# Altium PCB CSM32RV20_TSSOP20_V1.1.PcbDoc
Units mm, origin at the board's own origin, x right, y up, seen from the top; angles counter-clockwise.
Board outline 55.63 x 26.67 mm, 2 copper layers (Top Layer, Bottom Layer); 38 components, 38 nets, 164 pads, 187 vias.
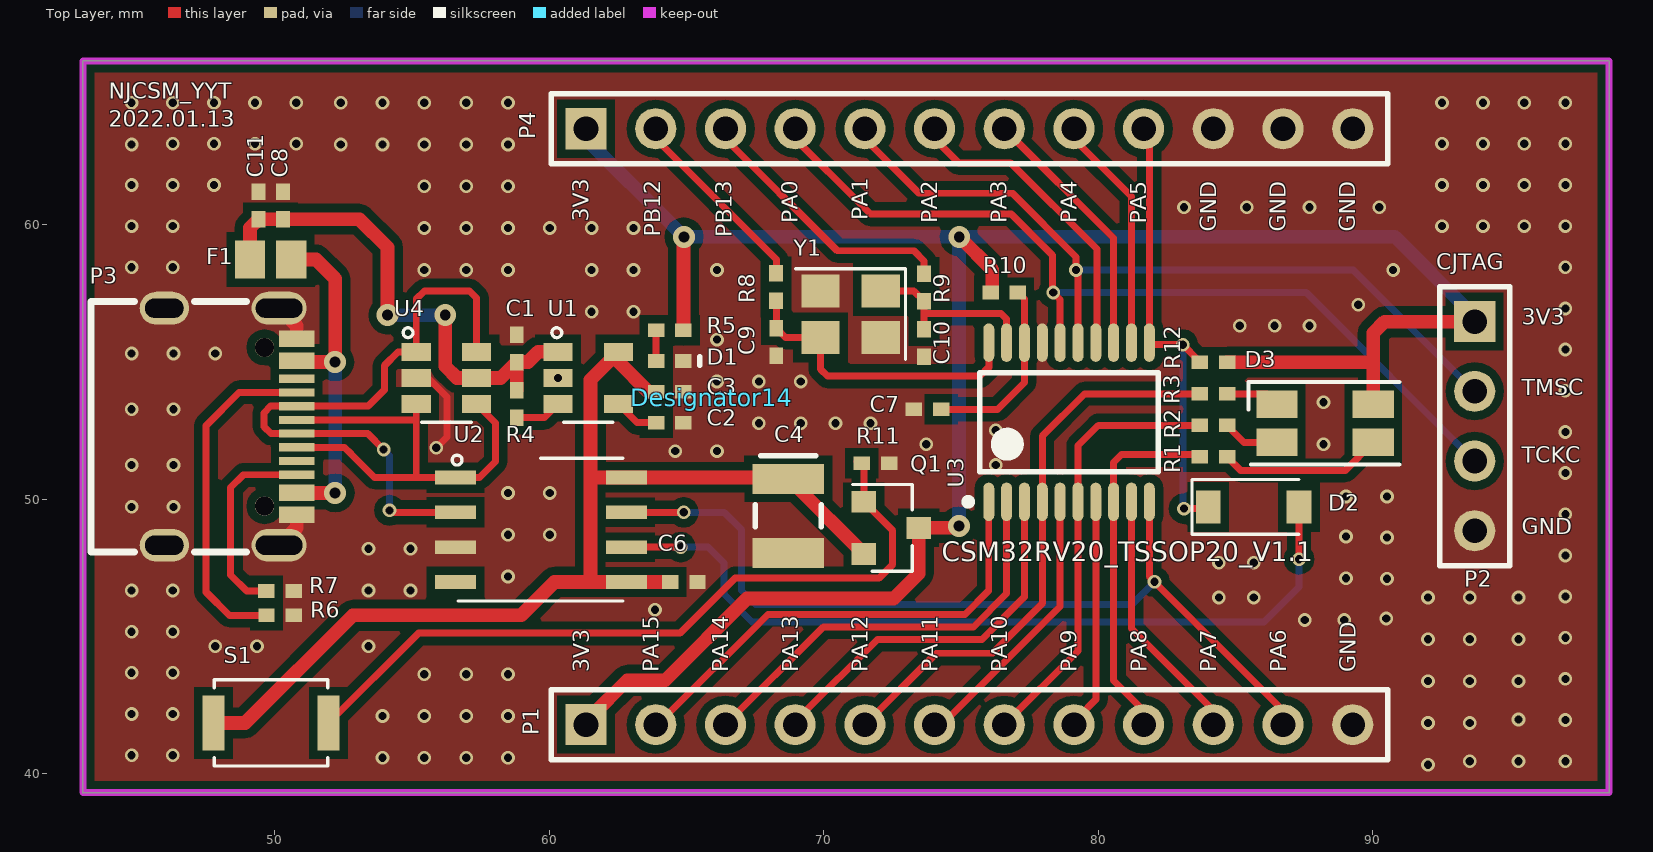
[diagram p0: Top Layer view]
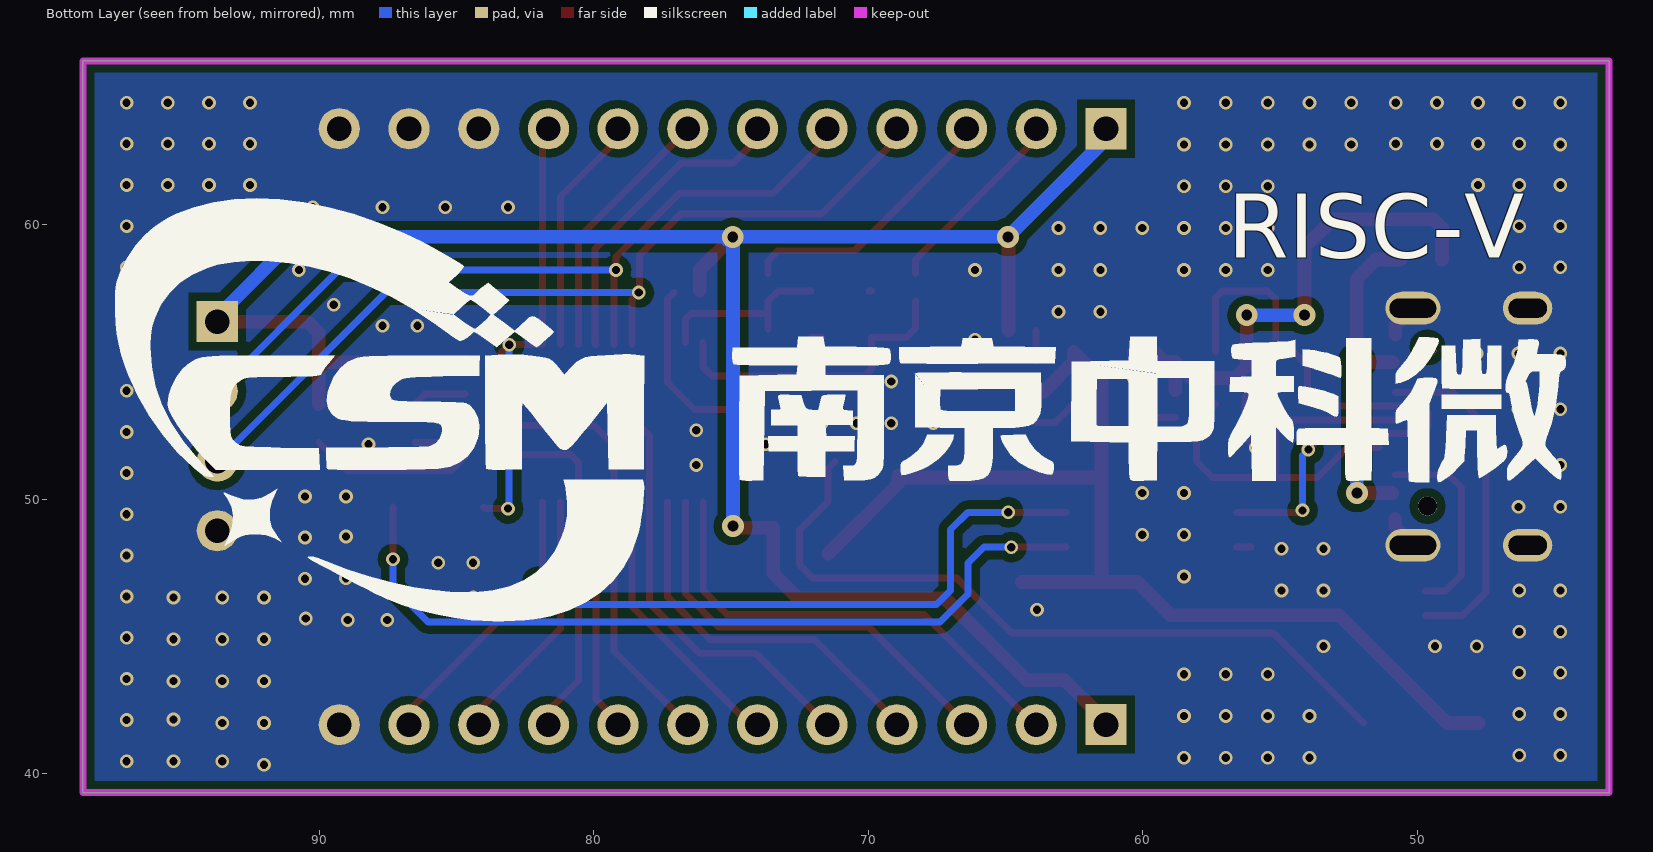
[diagram p1: Bottom Layer view, seen from below]

## Layer stack, top to bottom
Top Solder: solder mask 0.0102, Solder Resist, Dk 3.5
Top Layer: signal copper 0.0356
Dielectric1: dielectric 0.32, FR-4, Dk 4.8
Bottom Layer: signal copper 0.0356
Bottom Solder: solder mask 0.0102, Solder Resist, Dk 3.5

## Board outline
43.001,39.306 43.001,65.976 98.627,65.976 98.627,39.306

## Design rules (kind name [scope] priority, off if disabled: settings)
Clearance [All] p1: gap=0.2 ignorepadtopadclearanceinfootprint=TRUE except(0: Arc-Hole Track-Hole SMDPad-Hole THPad-Hole Via-Hole Fill-Hole Poly-Hole Region-Hole Text-Hole; 0.3: Arc-Fill Arc-Poly Arc-Region Track-Fill Track-Poly Track-Region SMDPad-Fill SMDPad-Poly SMDPad-Region THPad-Fill THPad-Poly THPad-Region Via-Fill Via-Poly Via-Region Fill-Fill Fill-Poly Fill-Region Poly-Poly Poly-Region Region-Region)
ComponentClearance [All] p1: gap=0.127 collisioncheckmode=3 verticalgap=0.254 showdistances=FALSE
MinimumSolderMaskSliver [All] p1: minsoldermaskwidth=0
PolygonConnect [All] p1: connectstyle=Direct reliefconductorwidth=0.254 reliefentries=4 polygonreliefangle="90 Angle" airgapwidth=0.254
RoutingVias [All] p1: holewidth=0.711 width=1.27 viastyle="Through Hole" minholewidth=0.29 minwidth=0.49 maxholewidth=0.711 maxwidth=1.27
SilkToSilkClearance [All] p1: silktosilkclearance=0.01
SilkToSolderMaskClearance [IsPad] p1: minsilkscreentomaskgap=0.001 clearancetoexposedcopper=TRUE
SolderMaskExpansion [All] p1: expansion=0.102
UnRoutedNet [All] p1: checkbadconnections=TRUE
Width [All] p1: maxlimit=0.5 minlimit=0.254 preferedwidth=0.254 minimp=50.000000 maximp=50.000000 favimp=50.000000
25 further rules are at their usual default settings.

## Components (designator, comment, footprint, x,y, rotation, side; value= is the part's Value field where it differs from the comment)
C1 "Cap" 0402 58.812,55.499 r270 top value=1uF
C2 "Cap" 0402 64.391,52.789 r180 top value=22nF
C3 "Cap" 0402 64.391,53.911 r180 top value=1uF
C4 "Cap Pol3" C1210 68.707,49.391 r270 top value=100uF
C6 "Cap" 0402 64.902,46.983 r180 top value=0.1uF
C7 "Cap" 0402 73.787,53.276 r0 top value=0.1uF
C8 "Cap" 0402 50.292,60.698 r270 top value=10uF
C9 "Cap" 0402 68.274,55.729 r270 top value=15pF
C10 "Cap" 0402 73.66,55.693 r270 top value=15pF
C11 "Cap" 0402 49.403,60.698 r270 top value=0.1uF
D1 "LED" "LED 0402" 64.391,55.033 r180 top
D2 "Diode" D_SOD-123 185.241,192.087 r270 top
D3 "LED_ARGB" LED_RGB_1210 -49.899,156.908 r0 top
Designator14 "Comment" LOGO-S 65.913,53.721 r180 top
F1 "0.1A" C0805 49.847,58.737 r180 top
P1 "Header 12" HDR1X12 61.341,41.783 r0 top
P2 "Header 4" HDR1X4 93.726,56.471 r270 top
P3 "USB_C_Receptacle_USB2.0" USB-C-SMD_KH-TYPE-C-16P 48.387,52.641 r270 top
P4 "Header 12" HDR1X12 61.341,63.5 r0 top
Q1 "PMOS-2" SOT-23 -49.201,152.336 r0 top
R1 "Res2" 0402 84.201,51.543 r0 top value=820R
R2 "Res2" 0402 84.201,52.691 r0 top value=820R
R3 "Res2" 0402 84.201,53.839 r0 top value=2.2K
R4 "Res2" 0402 58.812,53.475 r90 top value=2K
R5 "Res2" 0402 64.391,56.155 r0 top value=1K
R6 "Res2" 0402 50.195,45.767 r0 top value=5.1K
R7 "Res2" 0402 50.187,46.656 r0 top value=5.1K
R8 "Res2" 0402 68.266,57.729 r90 top value=0R
R9 "Res2" 0402 73.66,57.717 r90 top value=0R
R10 "Res2" 0402 76.581,57.531 r180 top value=10R
R11 "Res2" 0402 71.882,51.308 r180 top value=5K
R12 "Res2" 0402 84.201,54.988 r0 top value=10K
S1 "SW-PB" SW_PUSH_SPST_NO_ALPS_SKRK 149.554,194.373 r270 top
U1 "RT9193-33GB" SOT-23-5 -49.153,152.158 r0 top
U2 "CH340N" SOP-8-1EP_6X5MM_P1.27MM -49.201,152.336 r0 top
U3 "CSM32RV20_TSSOP20" CSM32RV20_TSSOP20 78.942,52.805 r90 top
U4 "USBLC6-2SC6" SOT-23-6 -48.777,152.145 r0 top
Y1 "32MHZ" CRYSTAL_SMD_3225-4PIN_3.2X2.5MM 231.131,-45.491 r180 top

## Footprints (in the part's own frame and the unit in brackets; to place one, negate y for a bottom-side part, rotate by r counter-clockwise, add the part's x,y. Pads: shape width x height; smd on the part's side, far side on the other; paste and mask are expansions set on the pad)
0402 [mm] "Chip Capacitor, Body 1.0x0.5mm, IPC High Density"
  rect 0.6x0.5 smd: 1(-0.5,0) 2(0.5,0)
  body extent -0.55,-0.3 0.55,0.3, height 1.3
C0805 [mm] "Chip Capacitor, Body 2.0x1.3mm, IPC High Density"
  rect 1.1x1.4 smd: 1(-0.75,0) 2(0.75,0)
  body extent -1.1,-0.72 1.1,0.72, height 1.4
C1210 [mm] "Chip Capacitor, Body 3.2x2.5mm, IPC High Density"
  rect 1.1x2.6 smd: 1(-1.35,0) 2(1.35,0)
  silkscreen extent -2.2,-1.2 0.4,1.2, body extent -1.7,-1.35 1.7,1.35, height 1.3
CRYSTAL_SMD_3225-4PIN_3.2X2.5MM [mm]
  rect 1.4x1.2 smd: 1(159.047,-103.085) 2(161.247,-103.085) 3(161.247,-101.385) 4(159.047,-101.385)
  silkscreen extent 158.15,-103.88 162.15,-100.58
CSM32RV20_TSSOP20 [mm] "TSOP, 20-Leads, Body 6.45x4.38mm, Pitch 0.65mm, IPC Medium Density"
  oval 1.4x0.4 smd: 1(-2.9,2.925) 2(-2.9,2.275) 3(-2.9,1.625) 4(-2.9,0.975) 5(-2.9,0.325) 6(-2.9,-0.325) 7(-2.9,-0.975) 8(-2.9,-1.625) 9(-2.9,-2.275) 10(-2.9,-2.925) 11(2.9,-2.925) 12(2.9,-2.275) 13(2.9,-1.625) 14(2.9,-0.975) 15(2.9,-0.325) 16(2.9,0.325) 17(2.9,0.975) 18(2.9,1.625) 19(2.9,2.275) 20(2.9,2.925)
  silkscreen extent -3.02,-3.25 1.8,3.8
D_SOD-123 [mm]
  rect 1.2x0.9 smd: 1(142.367,-101.22) 2(142.367,-97.918)
  round 0 smd: 1(142.367,-101.218) 2(142.367,-97.918)
  silkscreen extent 141.37,-101.82 143.37,-97.92
HDR1X4 [mm] "Connector; Header; 4 Position"
  rect 1.5x1.5 hole 0.9: 1(0,0)
  round 1.5 hole 0.9: 2(2.54,0) 3(5.08,0) 4(7.62,0)
  silkscreen extent -1.27,-1.27 8.89,1.27
HDR1X12 [mm] "Connector; Header; 12 Position"
  rect 1.5x1.5 hole 0.9: 1(0,0)
  round 1.5 hole 0.9: 2(2.54,0) 3(5.08,0) 4(7.62,0) 5(10.16,0) 6(12.7,0) 7(15.24,0) 8(17.78,0) 9(20.32,0) 10(22.86,0) 11(25.4,0) 12(27.94,0)
  silkscreen extent -1.27,-1.27 29.21,1.27
"LED 0402" [mm] "Chip Inductor, Body 1.0x0.5mm, IPC High Density"
  rect 0.6x0.5 smd: 1(0.5,0) 2(-0.5,0)
  silkscreen extent -1.1,-0.15 -1.1,0.15, body extent -0.55,-0.3 0.55,0.3, height 0.55
LED_RGB_1210 [mm]
  rect 1.5x1 smd: 1(139.926,-103.44) 2(139.926,-104.84) 3(136.426,-104.84) 4(136.426,-103.44)
  silkscreen extent 135.38,-105.64 140.88,-102.64
LOGO-S [mm]
SOP-8-1EP_6X5MM_P1.27MM [mm] "CH340N"
  rect 1.5x0.5 smd: 1(105.788,-101.543) 2(105.788,-102.813) 3(105.788,-104.083) 4(105.788,-105.353) 5(112.011,-105.353) 6(112.011,-104.083) 7(112.011,-102.813) 8(112.011,-101.543)
  round 0 smd: 1(105.788,-101.543) 2(105.788,-102.813) 3(105.788,-104.083) 4(105.788,-105.353) 5(111.988,-105.353) 6(111.988,-104.083) 7(111.988,-102.813) 8(111.988,-101.543)
  silkscreen extent 105.66,-106.05 111.89,-100.73
SOT-23 [mil]
  rect 35.43x31.5 smd: 1(4750.62,-4032.59) 2(4750.62,-4107.39) 3(4829.36,-4069.99)
  silkscreen extent 4735,-4132 4820,-4008
SOT-23-5 [mm]
  rect 1.06x0.65 smd: 1(109.469,-96.789) 2(109.469,-97.739) 3(109.469,-98.689) 4(111.669,-98.689) 5(111.669,-96.789)
  silkscreen extent 109.25,-99.35 111.47,-95.91
SOT-23-6 [mm]
  rect 1.06x0.65 smd: 1(103.929,-96.776) 2(103.929,-97.726) 3(103.929,-98.676) 4(106.129,-98.676) 5(106.129,-97.726) 6(106.129,-96.776)
  silkscreen extent 103.45,-99.34 105.93,-95.9
SW_PUSH_SPST_NO_ALPS_SKRK [mm]
  rect 2x0.8 smd: 1(152.527,-97.595) 2(152.527,-101.795)
  round 0 smd: roundrect(152.527,-101.795) roundrect(152.527,-97.595)
  silkscreen extent 150.96,-101.76 154.1,-97.62
USB-C-SMD_KH-TYPE-C-16P [mm]
  rect 0.3x1.3 smd: A1(-3.35,2.415) A4(-2.55,2.415) A5(-1.25,2.415) A6(-0.25,2.415) A7(0.25,2.415) A8(1.25,2.415) A9(2.55,2.415) A12(3.35,2.415) B1(3.05,2.415) B4(2.25,2.415) B5(1.75,2.415) B6(0.75,2.415) B7(-0.75,2.415) B8(-1.75,2.415) B9(-2.25,2.415) B12(-3.05,2.415)
  oval 1.2x2 hole 0.7 slot 1.7 at 90 deg: S1(-4.32,1.765) S1(4.32,1.765)
  oval 1.2x1.8 hole 0.7 slot 1.4 at 90 deg: S1(-4.32,-2.415) S1(4.32,-2.415)
  round 0.7 hole 0.7 unplated: ""(-2.89,1.235) ""(2.89,1.235)
  silkscreen extent -4.57,-5.08 4.57,0.57

## Part data
C1 C2 C3 C6 C7 C8 C9 C10 C11: "Capacitor", LatestRevisionDate=17-Jul-2002, LatestRevisionNote="Re-released for DXP Platform.", PackageDescription="Radial Cap, Thru-Hole; 2 Leads; 0.3 in Pin Spacing", PackageReference=RAD-0.3, Published=8-Jun-2000, Publisher="Altium Limited"
C4: "Polarized Capacitor (Surface Mount)", LatestRevisionDate=29-May-2009, LatestRevisionNote="IPC-7351 Footprint Added.", PackageDescription="Chip Capacitor", PackageReference=C0805, Published=8-Jun-2000, Publisher="Altium Limited"
D1: library part LED0, "Typical INFRARED GaAs LED", LatestRevisionDate=08-Jul-2005, LatestRevisionNote="Mech Layer 1 removed.", PackageDescription="LED; 2 Leads", PackageReference=LED-0, Published=8-Jun-2000, Publisher="Altium Limited"
D2: "Default Diode", Code_JEDEC=DO-214-AB, LatestRevisionDate=17-Jul-2002, LatestRevisionNote="Re-released for DXP Platform.", PackageDescription="DO-214-AB/SMC; 2 C-Bend Leads; Body 7.9 x 5.9 mm, inc. leads (LxW)", PackageReference=SMC, PackageVersion=Sep-1996, Published=8-Jun-2000, Publisher="Altium Limited"
F1: library part "Fuse 1", "Fuse", LatestRevisionDate=17-Jul-2002, LatestRevisionNote="Re-released for DXP Platform.", PackageDescription="Thru-Hole; 2 Leads", PackageReference=PIN-W2/E2.8, Published=8-Jun-2000, Publisher="Altium Limited"
P1 P4: "Header, 12-Pin", LatestRevisionDate=17-Jul-2002, LatestRevisionNote="Re-released for DXP Platform.", Publisher="Altium Limited"
P2: "Header, 4-Pin", LatestRevisionDate=17-Jul-2002, LatestRevisionNote="Re-released for DXP Platform.", Publisher="Altium Limited"
Q1: "P-Channel Power MOSFET", ComponentLink1Description="Manufacturer Link", ComponentLink1URL=http://www.irf.com/, DatasheetVersion=PD-9.390D, LatestRevisionDate=17-Jul-2002, LatestRevisionNote="Re-released for DXP Platform.", Note="Pin 4 not drawn and electrically connected to Pin 2.", PackageDescription="TO, Thru-Hole, Vertical, Heatsink Mounted; 3 In-Line Leads; Pitch 2.54 mm", PackageReference=TO-220AB, PackageVersion=Feb-1997, Published=8-Jun-2000, Publisher="Altium Limited"
R1 R2 R3 R4 R5 R6 R7 R8 R9 R10 R11 R12: "Resistor", LatestRevisionDate=17-Jul-2002, LatestRevisionNote="Re-released for DXP Platform.", PackageDescription="Axial Device, Thru-Hole; 2 Leads; 0.4 in Pin Spacing", PackageReference=AXIAL-0.4, Published=8-Jun-2000, Publisher="Altium Limited"
S1: "Switch", LatestRevisionDate=17-Jul-2002, LatestRevisionNote="Re-released for DXP Platform.", PackageDescription="Switch; 2 Leads", PackageReference=SPST-2, Published=24-Mar-1999, Publisher="Altium Limited"
U3: library part CSM32RV20_TSSOP20_1
Y1: library part Crystal
P3: Datasheet=https://www.usb.org/sites/default/files/documents/usb_type-c.zip
U4: Datasheet=https://www.st.com/resource/en/datasheet/usblc6-2.pdf

## Via types
v1: diameter 0.5, hole 0.3, Top Layer to Bottom Layer, tented both sides, 180 vias
v2: diameter 0.8, hole 0.4, Top Layer to Bottom Layer, tented both sides, 7 vias

## Nets (pads, with @x,y where several pads share a name; then routed paths per layer and width w, separated by ;. In a path a pad name is that pad's centre, name@x,y a point inside that pad or via, vN(x,y) a via of type N, cw(c..) or ccw(c..) an arc to the next point about the centre after c; other vN are vias at no path point)
3V3: D3.1 P1.1 P2.1 P4.1 Q1.3 R5.2 R10.2 R12.2 | length 80.9
  Top Layer w0.5: P1.1@61.543,42.1 62.843,43.4 64.228,43.4 67.207,46.379 72.553,46.379 73.465,47.291 Q1.3 74.866,48.958 v2(74.93,49.022) ; R5.2 64.891,59.545 v2(64.909,59.562) ; v2(74.942,59.562) 76.148,58.356 R10.2@76.148,57.594 ; R12.2 90.023,54.988 90.027,54.991 ; D3.1 90.027,54.991 ; P2.1 90.444,56.471 90.027,56.054 90.027,54.991
  Bottom Layer w0.5: P4.1@61.035,63.436 v2(64.909,59.562) v2(74.942,59.562) 90.817,59.562 P2.1@93.547,56.832 ; v2(74.93,49.022) 74.93,59.487 75.005,59.562 v2@75.129,59.439
+5: C1.2 C8.2 C11.2 F1.2 R4.2 U1.1 U4.5 | length 18.8
  Top Layer w0.5: F1.2 49.097,59.892 C11.2 C8.2 53.086,60.198 54.102,59.182 v2(54.102,56.705) ; v2(56.209,56.705) 56.209,54.847 56.637,54.419 U4.5 58.232,54.419 C1.2 ; R4.2 C1.2 ; U1.1@60.316,55.322 U1.1 59.595,55.369 59.225,54.999 C1.2
  Bottom Layer w0.5: v2@54.177,56.705 v2(56.209,56.705)
GND: C1.1 C2.1 C3.1 C4.2 C6.1 C7.1 C8.1 C9.2 C10.2 C11.1 D1.2 P1.12 P2.4 P3.A1 P3.A12 P3.B1 P3.B12 P3.S1 P4.10 P4.11 P4.12 R6.2 R7.2 R11.1 U1.2 U2.3 U3.17 U4.2 Y1.2 Y1.4 | length 7
  Top Layer w0.254: U4.2 55.579,54.419 56.277,53.721 56.277,52.271 v1(55.877,51.872) ; U2.3@56.062,48.253 U2.3@56.587,48.253 ; Y1.2 Y1.2@69.984,57.594 ; Y1.4@71.684,55.894 Y1.4
  Top Layer w0.5: P3.S1@50.152,48.321 50.802,48.971 P3.A12 ; P3.S1@50.152,56.961 50.802,56.311 P3.A1 ; P3.S1@50.449,48.321 P3.S1@50.501,48.269
  other v1: 92.023,40.322 93.547,40.449 95.325,40.449 97.031,40.452 53.923,40.576 55.447,40.576 56.971,40.576 58.495,40.576 44.779,40.672 46.279,40.672 92.023,41.846 93.547,41.846 95.325,41.973 97.031,41.952 53.923,42.1 55.447,42.1 56.971,42.1 58.495,42.1 44.779,42.172 46.279,42.172 92.023,43.37 93.547,43.37 95.325,43.37 97.031,43.452 55.447,43.624 56.971,43.624 58.495,43.624 44.779,43.672 46.279,43.672 47.827,44.64 49.351,44.64 53.415,44.64 92.023,44.894 93.547,44.894 95.325,44.894 97.031,44.952 44.779,45.172 46.279,45.172 87.53,45.601 88.975,45.601 90.499,45.656 63.854,45.97 84.403,46.418 85.673,46.418 92.023,46.418 93.547,46.418 95.325,46.418 97.031,46.452 44.779,46.672 46.279,46.672 53.415,46.672 54.939,46.672 90.53,47.101 89.039,47.116 58.495,47.18 84.403,47.688 85.673,47.688 97.031,47.952 53.415,48.196 54.939,48.196 90.53,48.601 89.039,48.64 58.495,48.704 60.019,48.704 97.031,49.452 44.779,49.72 46.303,49.72 89.039,50.101 90.53,50.101 58.495,50.228 60.019,50.228 97.031,50.952 44.779,51.244 46.303,51.244 76.275,51.244 64.591,51.752 66.115,51.752 73.735,52.006 88.213,52.006 97.031,52.452 76.275,52.514 67.639,52.768 69.163,52.768 70.433,52.768 71.703,52.768 44.779,53.276 46.303,53.276 88.213,53.53 97.031,53.952 66.115,54.292 67.639,54.292 69.163,54.292 60.316,54.419 44.779,55.308 46.303,55.308 47.827,55.308 97.031,55.452 66.115,55.816 85.165,56.324 86.435,56.324 87.705,56.324 61.543,56.832 63.067,56.832 97.031,56.952 89.483,57.086 55.447,58.356 56.971,58.356 58.495,58.356 61.543,58.356 63.067,58.356 66.115,58.356 90.753,58.356 44.779,58.452 46.279,58.452 97.031,58.452 55.447,59.88 56.971,59.88 58.495,59.88 60.019,59.88 61.543,59.88 63.067,59.88 44.779,59.952 46.279,59.952 92.531,59.952 94.031,59.952 95.531,59.952 97.031,59.952 83.133,60.642 85.419,60.642 87.705,60.642 90.245,60.642 55.447,61.404 56.971,61.404 58.495,61.404 44.779,61.452 46.279,61.452 47.779,61.452 92.531,61.452 94.031,61.452 95.531,61.452 97.031,61.452 44.779,62.928 52.399,62.928 53.923,62.928 55.447,62.928 56.971,62.928 58.495,62.928 46.279,62.952 47.779,62.952 49.279,62.952 50.779,62.952 92.531,62.952 94.031,62.952 95.531,62.952 97.031,62.952 44.779,64.452 46.279,64.452 47.779,64.452 49.279,64.452 50.779,64.452 52.399,64.452 53.923,64.452 55.447,64.452 56.971,64.452 58.495,64.452 92.531,64.452 94.031,64.452 95.531,64.452 97.031,64.452
NetC2_2: C2.2 U1.4 | length 1.7
  Top Layer w0.254: U1.4 63.196,52.789 C2.2
NetC7_2: C7.2 R10.1 U3.18 | length 6.8
  Top Layer w0.254: C7.2 76.339,53.276 77.317,54.254 U3.18 77.317,57.295 R10.1
NetC9_1: C9.1 R8.1 U3.20 Y1.3 | length 11.2
  Top Layer w0.254: R8.1 68.274,57.221 C9.1 68.609,55.894 Y1.3 69.884,54.737 70.138,54.483 75.692,54.483 76.017,54.808 U3.20
NetC10_1: C10.1 R9.1 U3.19 Y1.1 | length 6.7
  Top Layer w0.254: Y1.1 73.283,57.594 R9.1 73.66,56.769 ; C10.1 73.66,56.769 ; U3.19 76.667,56.568 76.466,56.769 73.66,56.769
NetD1_1: D1.1 R5.1 | length 1.1
  Top Layer w0.254: D1.1 R5.1
NetD2_2: D2.2 U2.6 | length 30
  Top Layer w0.254: U2.6@62.787,48.253 v1(64.788,48.253) ; v1(87.323,47.814) D2.2@87.323,49.72
  Bottom Layer w0.254: v1(64.788,48.253) 65.786,48.253 66.369,47.67 66.369,46.545 67.385,45.529 81.736,45.529 ; 81.99,45.529 81.736,45.529 ; v1(87.323,47.814) 87.323,46.798 86.054,45.529 81.736,45.529
NetD3_2: D3.2 R1.2 | length 6
  Top Layer w0.254: R1.2 85.19,51.054 89.013,51.054 D3.2 ; R1.2@84.721,51.625 R1.2@84.752,51.594
NetD3_3: D3.3 R2.2 | length 2.1
  Top Layer w0.254: R2.2 85.324,52.068 D3.3 ; R2.2@84.721,52.768 R2.2@84.749,52.739
NetD3_4: D3.4 R3.2 | length 2
  Top Layer w0.254: R3.2 86.155,53.839 D3.4
NetF1_1: F1.1 P3.A4 P3.A9 P3.B4 P3.B9 | length 12.3
  Top Layer w0.5: F1.1 51.499,58.737 52.197,58.039 v2(52.197,54.999) P3.B9@50.883,54.999 ; P3.A9@50.912,50.228 v2(52.197,50.228)
  Bottom Layer w0.5: v2(52.197,50.228) v2(52.197,54.999)
NetP3_A5: P3.A5 R6.1 | length 12.4
  Top Layer w0.254: R6.1 48.34,45.767 47.498,46.609 47.498,52.693 48.696,53.891 P3.A5
NetP3_B5: P3.B5 R7.1 | length 7.3
  Top Layer w0.254: R7.1 48.975,46.656 48.387,47.244 48.387,50.419 48.859,50.891 P3.B5
NetQ1_1: Q1.1 R11.2 S1.1 | length 27.2
  Top Layer w0.254: S1.1 55.229,45.116 64.77,45.116 66.774,47.12 72.024,47.12 72.517,47.613 72.517,48.856 Q1.1 71.465,51.124 R11.2@71.218,51.371
NetR4_1: R4.1 U1.3 | length 1.7
  Top Layer w0.254: R4.1 59.822,52.975 U1.3
PA0: P2.3 P4.4 U3.16 | length 32.8
  Top Layer w0.254: P4.4@68.655,63.436 71.703,60.388 76.836,60.388 78.334,58.891 78.334,57.567 v1(78.371,57.53) 78.617,57.284 U3.16@78.617,55.63
  Bottom Layer w0.254: v1(78.371,57.53) 87.587,57.53 P2.3
PA1: P2.2 P4.5 U3.15 | length 29.6
  Top Layer w0.254: P4.5@71.195,63.436 73.481,61.15 76.878,61.15 79.196,58.831 v1(79.196,58.356) 79.267,58.285 U3.15 U3.15@79.267,55.63
  Bottom Layer w0.254: v1(79.196,58.356) 89.301,58.356 P2.2 P2.2@93.579,53.931
PA2: P4.6 U3.14 | length 11.5
  Top Layer w0.254: P4.6@73.735,63.436 74.91,62.261 76.814,62.261 79.958,59.116 79.958,55.671 U3.14@79.917,55.63
PA3: P4.7 U3.13 | length 9.9
  Top Layer w0.254: P4.7@76.275,63.436 P4.7@76.396,63.315 ; P4.7@76.835,63.5 P4.7 80.567,59.514 U3.13 U3.13@80.567,55.63
PA4: P4.8 U3.12 | length 8.8
  Top Layer w0.254: P4.8@78.815,63.436 81.217,61.034 U3.12@81.217,55.63
PA5: D2.1 P4.9 R12.1 U3.11 | length 17
  Top Layer w0.254: P4.9@81.355,63.436 81.867,62.924 81.867,55.63 v1(83.088,55.63) R12.1@83.664,55.054 ; v1(83.133,49.657) 83.96,49.657 D2.1@84.023,49.72
  Bottom Layer w0.254: v1(83.088,55.63) 83.088,49.702 v1(83.133,49.657)
PA6: P1.11 U2.7 U3.10 | length 32.2
  Top Layer w0.254: U2.7@62.787,49.523 v1(64.902,49.523) ; U3.10 81.867,47.176 v1(82.054,46.989) P1.11@86.943,42.1
  Bottom Layer w0.254: v1(64.902,49.523) 66.376,49.523 67.004,48.895 67.004,46.672 67.512,46.164 81.228,46.164 v1(82.054,46.989)
PA7: P1.10 U3.9 | length 9.1
  Top Layer w0.254: U3.9 81.217,45.286 P1.10@84.403,42.1
PA8: P1.9 R1.1 U3.8 | length 13.1
  Top Layer w0.254: P1.9@81.863,42.1 80.567,43.396 U3.8 80.567,51.345 80.847,51.625 R1.1@83.751,51.625
PA9: P1.8 U3.7 | length 8.1
  Top Layer w0.254: P1.8@79.323,42.1 79.917,42.694 U3.7
PA10: P1.7 R2.1 U3.6 | length 16.1
  Top Layer w0.254: P1.7 79.267,44.469 79.267,51.95 79.895,52.578 80.008,52.691 R2.1 ; R2.1@83.701,52.768 R2.1@83.751,52.768
PA11: P1.6 U3.5 | length 9.8
  Top Layer w0.254: P1.6@74.243,42.1 74.624,42.1 78.617,46.093 U3.5
PA12: P1.5 R3.1 U3.4 | length 20.8
  Top Layer w0.254: P1.5 74.104,44.386 76.148,44.386 77.967,46.205 77.967,52.301 79.505,53.839 R3.1 ; R3.1@83.701,53.911 R3.1@83.751,53.911
PA13: P1.4 U3.3 | length 13.4
  Top Layer w0.254: P1.4@69.163,42.1 71.957,44.894 75.767,44.894 77.317,46.444 U3.3
PA14: P1.3 U3.2 | length 15.6
  Top Layer w0.254: P1.3 69.986,45.348 75.459,45.348 76.667,46.556 U3.2
PA15: P1.2 U3.1 | length 17.4
  Top Layer w0.254: P1.2 63.947,41.783 67.966,45.802 75.151,45.802 76.017,46.668 U3.1
PB12: P4.2 R8.2 | length 7.2
  Top Layer w0.254: P4.2@63.575,63.436 68.274,58.737 R8.2@68.274,58.229
PB13: P4.3 R9.2 | length 10
  Top Layer w0.254: P4.3@66.115,63.436 66.236,63.315 70.496,59.055 73.287,59.055 73.66,58.682 R9.2
USB_D+: P3.A6 P3.B6 U2.1 U4.3 U4.4 | length 16.8
  Top Layer w0.254: P3.A6 55.084,52.891 55.152,52.959 ; P3.B6@51.364,51.891 52.538,51.891 52.792,51.637 52.792,51.633 53.632,50.793 55.123,50.793 ; U4.3 55.152,52.959 ; U4.4 58.039,52.782 58.039,51.371 57.461,50.793 56.587,50.793 55.123,50.793 ; 55.123,50.793 55.152,50.822 55.152,52.959
USB_D-: P3.A7 P3.B7 U2.2 U4.1 U4.6 | length 23.6
  Top Layer w0.254: v1(53.963,51.813) 53.384,52.391 51.364,52.391 50.389,52.391 49.855,52.391 49.605,52.641 49.605,52.831 49.605,53.149 49.847,53.391 51.364,53.391 53.403,53.391 53.987,53.974 53.987,54.863 54.492,55.369 U4.1 55.152,57.299 55.447,57.594 57.098,57.594 57.352,57.34 U4.6 ; v1(54.177,49.593) 54.247,49.523 56.587,49.523 U2.2@56.272,49.523
  Bottom Layer w0.254: v1(53.963,51.813) 54.177,51.598 v1(54.177,49.593)
VCC3.3: C3.2 C4.1 C6.2 Q1.2 S1.2 U1.5 U2.5 U2.8 | length 41.2
  Top Layer w0.5: S1.2 48.914,41.846 52.835,45.767 58.975,45.767 60.191,46.983 61.595,46.983 ; C3.2 63.618,53.911 62.516,55.013 U1.5 61.503,54.356 61.503,50.8 ; C6.2 62.81,46.983 61.595,46.983 ; Q1.2 68.909,50.564 68.909,50.866 68.836,50.793 62.81,50.793 61.51,50.793 61.503,50.8 ; 61.503,50.8 61.503,47.075 61.595,46.983
pads on no net: P3. P3.A8 P3.B8 S1.roundrect U2.4

## Polygon pours and split planes (outlines as drawn)
GND on Bottom Layer "Bottom Layer-GND" (solid, pour order 0): 98.373,39.56 43.255,39.56 43.255,65.722 98.373,65.722
GND on Top Layer "Top Layer-GND" (solid, pour order 2): 98.373,39.56 43.255,39.56 43.255,65.722 98.373,65.722

## Keep-outs
Keep-Out Layer:
  lines w0.254: 43.001,39.306 43.001,65.976 96.849,65.976 98.119,65.976 98.627,65.976 98.627,39.306 98.119,39.306 96.849,39.306 43.001,39.306

## Silkscreen, mask and mechanical layers (free items; w line width, h text height)
Top Overlay:
  text "NJCSM_YYT" at 43.942,64.389 h1
  text "2022.01.13" at 43.941,63.373 h1
  text "PA1" at 71.799,60.173 h1 r90
  text "3V3" at 61.639,60.117 h1 r90
  text "PA0" at 69.259,60.051 h1 r90
  text "PA2" at 74.339,60.056 h1 r90
  text "PA3" at 76.879,60.05 h1 r90
  text "PA4" at 79.419,60.052 h1 r90
  text "PA5" at 81.959,60.045 h1 r90
  text "GND" at 84.499,59.738 h1 r90
  text "GND" at 87.039,59.738 h1 r90
  text "GND" at 89.579,59.738 h1 r90
  text "PB12" at 64.243,59.559 h1 r90
  text "PB13" at 66.846,59.552 h1 r90
  text "CJTAG" at 92.329,58.166 h1
  text "3V3" at 95.444,56.164 h1
  text "TMSC" at 95.444,53.594 h1
  text "TCKC" at 95.444,51.124 h1
  text "GND" at 95.444,48.514 h1
  text "CSM32RV20_TSSOP20_V1.1" at 74.295,47.498 h1.2
  text "3V3" at 61.651,43.686 h1 r90
  text "PA15" at 64.191,43.686 h1 r90
  text "PA14" at 66.731,43.686 h1 r90
  text "PA13" at 69.271,43.686 h1 r90
  text "PA12" at 71.811,43.686 h1 r90
  text "PA11" at 74.351,43.686 h1 r90
  text "PA10" at 76.891,43.686 h1 r90
  text "PA9" at 79.431,43.686 h1 r90
  text "PA8" at 81.971,43.686 h1 r90
  text "PA7" at 84.511,43.686 h1 r90
  text "PA6" at 87.051,43.686 h1 r90
  text "GND" at 89.591,43.686 h1 r90
Bottom Overlay:
  text "RISC-V" at 56.896,58.039 h4
Document:
  lines w0.15: 47.446,39.56 47.573,39.56 ; 47.446,65.722 47.573,65.722 ; 43.255,39.56 96.595,39.56 97.865,39.56 98.373,39.56 98.373,65.722 97.865,65.722 96.595,65.722 43.255,65.722 43.255,39.56

## Text inside footprints (layer, text, board x,y; h text height)
D2: Document "D3" at 84.658,47.307 h1
D3: Document "D2" at 87.476,54.568 h1
S1: Document "NRESET" at 47.459,41.346 h1